# Altium PCB P-FTINT-2-0.PcbDoc
Units mm, origin at the board's own origin, x right, y up, seen from the top; angles counter-clockwise.
Board outline 80.05 x 70.07 mm, 2 copper layers (Component Side, Solder Side), stack 1.571 mm thick; 30 components, 42 nets, 172 pads, 17 vias.
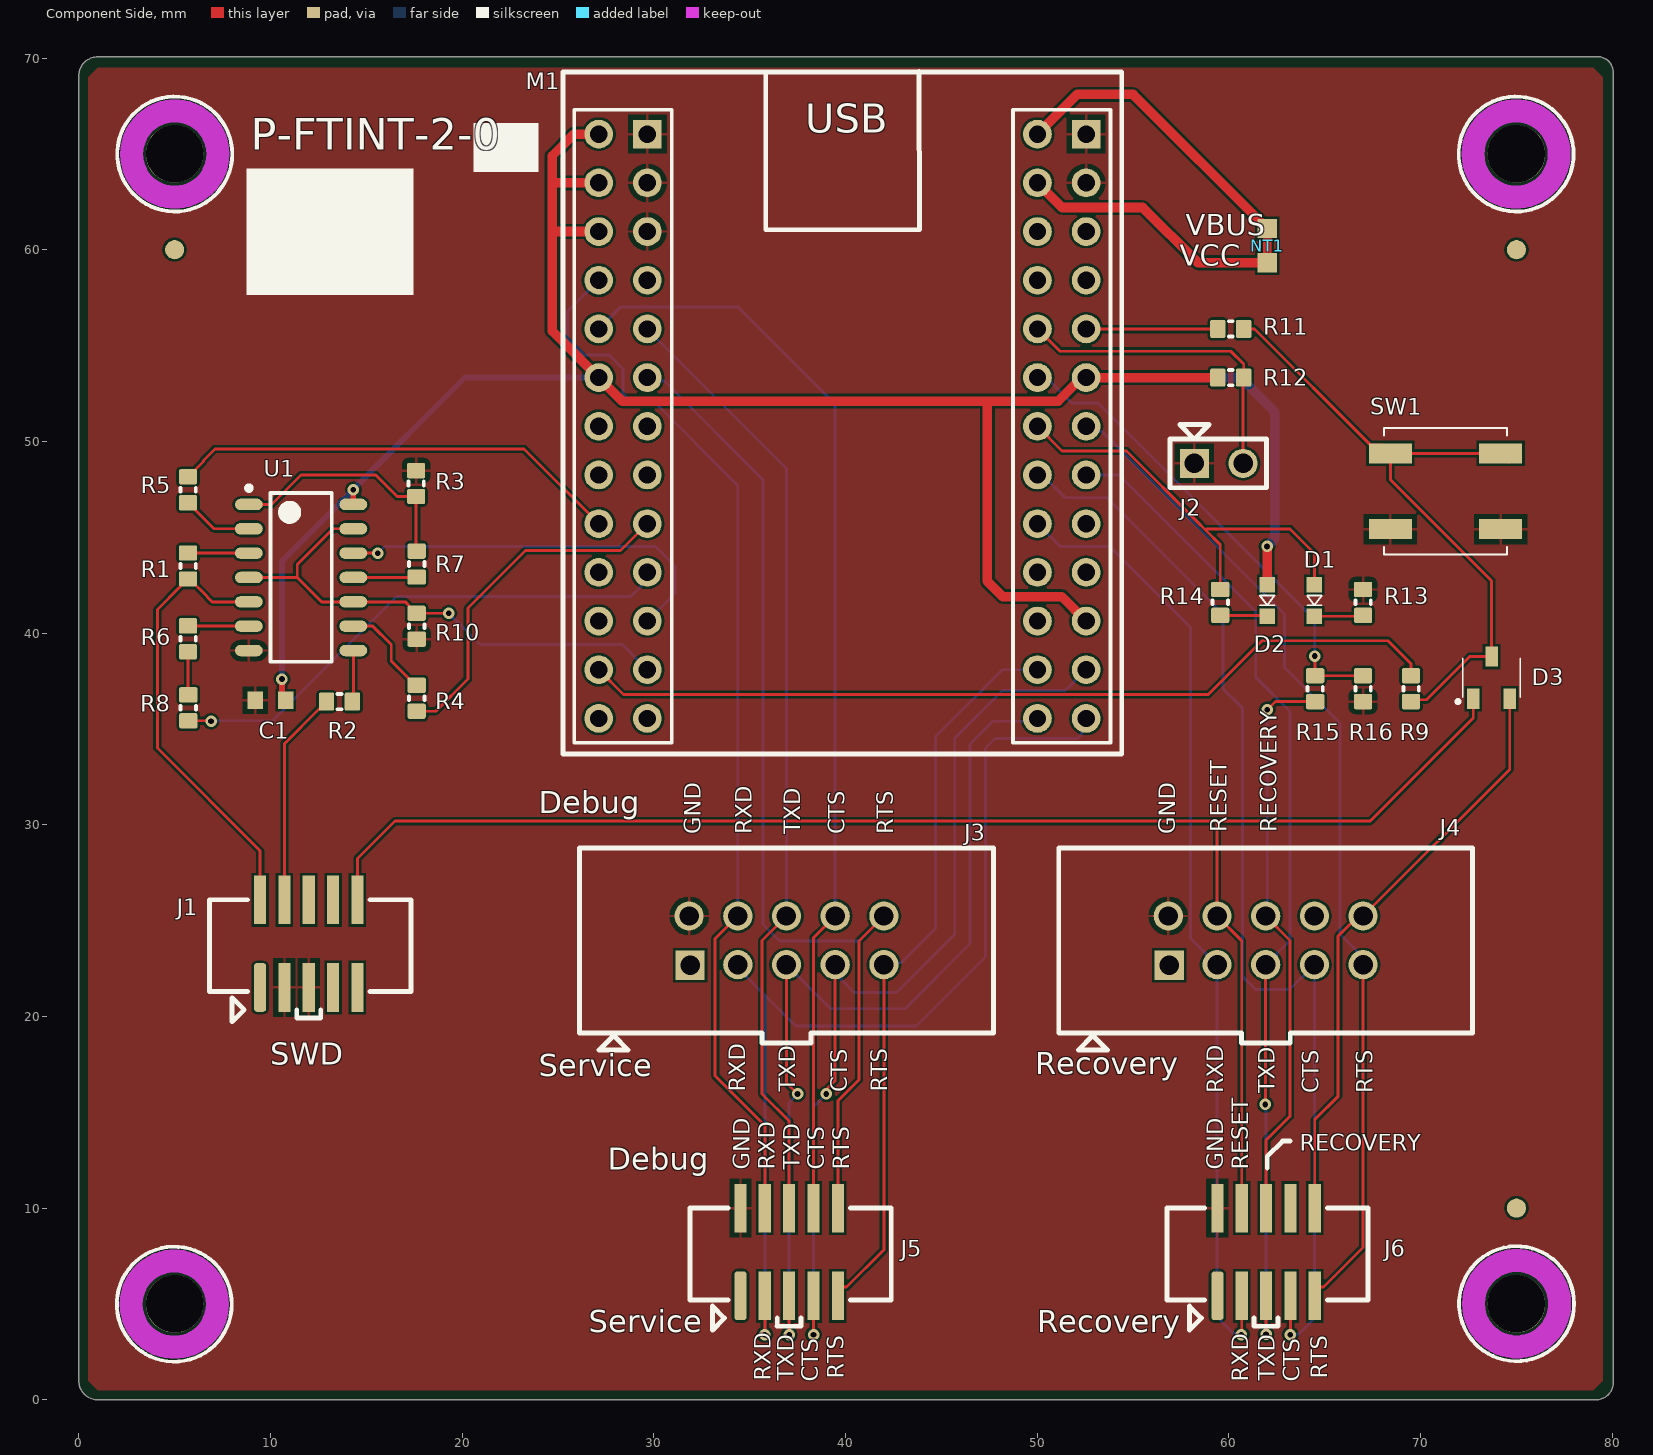
[diagram p0: Component Side view]
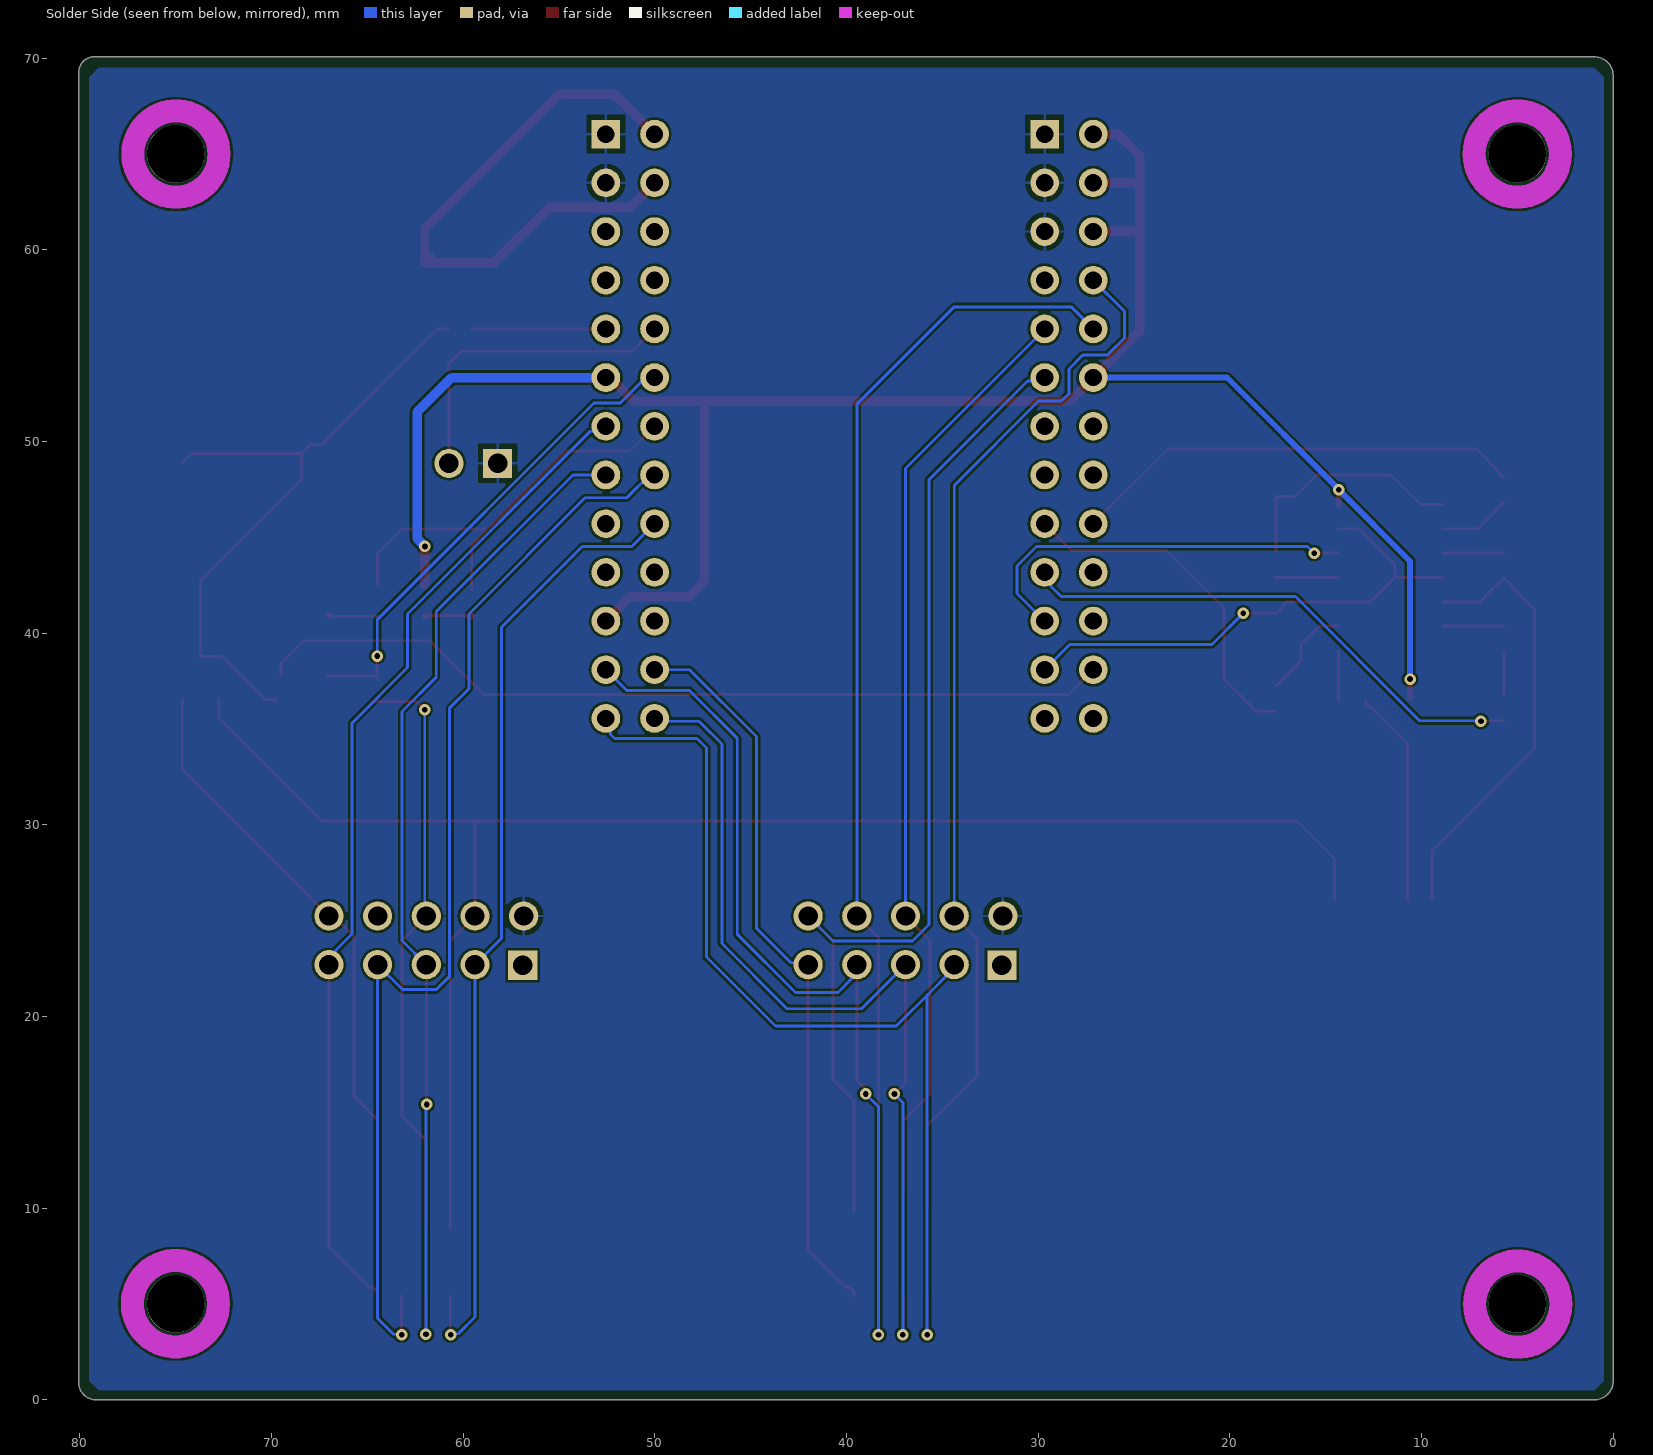
[diagram p1: Solder Side view, seen from below]

## Layer stack, top to bottom
Top Solder: solder mask 0.0102, Solder Resist, Dk 3.5
Component Side: signal copper 0.0356
Dielectric 1: core 1.5, FR-4, Dk 4.3
Solder Side: signal copper 0.0356
Bottom Solder: solder mask 0.0102, Solder Resist, Dk 3.5

## Board outline
1,0 cw(c1,1) 0,1 0,69.065 cw(c1,69.065) 1,70.065 79.25,70.065 cw(c79.25,69.267) 80.048,69.267 80.05,69.267 80.05,0.9 cw(c79.148,0.9) 79.148,-0.002

## Design rules (kind name [scope] priority, off if disabled: settings)
Clearance [All] p1: gap=0.125 ignorepadtopadclearanceinfootprint=TRUE except(0.012: Arc-Text Track-Text SMDPad-Text THPad-Text Via-Text Fill-Text Poly-Text Region-Text Text-Text)
DiffPairsRouting [All] p1: maxlimit=10 minlimit=0.125 mostfreqgap=0.15 toplayer_minwidth=0.381 toplayer_maxwidth=0.381 toplayer_prefwidth=0.381 bottomlayer_minwidth=0.381 bottomlayer_maxwidth=0.381 bottomlayer_prefwidth=0.381 maxuncoupledlength=12.7
FabricationTestPointUsage FabricationTestPointUsage_1 [All] p1: valid=0 allowmultiple=FALSE
FabricationTestpoint FabricationTestpoint_1 [All] p1: side=3 testpointundercomponent=TRUE minsize=1.016 maxsize=2.54 preferedsize=1.524 minholesize=0 maxholesize=1.016 preferedholesize=0.813 testpointgrid=0.025 allowsidetop=TRUE allowsidebottom=TRUE usegrid=TRUE gridtolerance=0
HoleSize [All] p1: absolutevalues=TRUE maxlimit=6 minlimit=0.2 maxpercent=80.000 minpercent=20.000
HoleSize FabricationTestpoint [All] p2 off: absolutevalues=TRUE maxlimit=2.54 minlimit=0.025 maxpercent=80.000 minpercent=20.000
HoleSize FabricationTestPointUsage [All] p3 off: absolutevalues=TRUE maxlimit=2.54 minlimit=0.025 maxpercent=80.000 minpercent=20.000
MinimumSolderMaskSliver [All] p1: minsoldermaskwidth=0.07
MinimumSolderMaskSliver SilkscreenOverComponentPads [All] p2: minsoldermaskwidth=0.254
PlaneClearance [All] p1: clearance=0.5
PlaneConnect [All] p1: planeconnectstyle=Relief reliefexpansion=0.4 reliefentries=4 reliefconductorwidth=0.15 reliefairgap=0.15
PolygonConnect [All] p1: connectstyle=Relief reliefconductorwidth=0.15 reliefentries=4 polygonreliefangle="90 Angle" airgapwidth=0.254
RoutingCorners [All] p1: cornerstyle=45-Degree minsetback=1.25 maxsetback=1.25
RoutingVias [All] p1: holewidth=0.3 width=0.6 viastyle="Through Hole" minholewidth=0.2 minwidth=0.45 maxholewidth=0.45 maxwidth=0.75
SilkToSilkClearance [All] p1: silktosilkclearance=0.154
SilkToSolderMaskClearance [IsPad] p1: minsilkscreentomaskgap=0.05 clearancetoexposedcopper=TRUE
SolderMaskExpansion [All] p1: expansion=0.03 istentingtop=FALSE
Width [All] p1: maxlimit=10 minlimit=0.125 preferedwidth=0.15
20 further rules are at their usual default settings.

## Components (designator, comment, footprint, x,y, rotation, side; value= is the part's Value field where it differs from the comment)
C1 "0.1uF" "CAP 0603 (1608) x 1.2mm" 10,36.5 r0 top
D1 "SML-D12U" "Rohm SML-D12 Red" 64.46,41.7 r90 top
D2 "SML-D12P" "Rohm SML-D12 Green" 62,41.7 r90 top
D3 "BAR43CFILM" ON_SEMI-SOT23-3 73.7,37.675 r0 top
J1 "FTSH-105-01-F-DV-K" SAMTEC-FTSH-105-01-X-DV-K 12,23.8 r90 top
J2 "MOLEX-0022284020" 0022284020 58.149,48.825 r0 top
J3 "T821110A1S100CEU" "10 Way shrouded IDC hdr" 36.92,23.957 r0 top locked
J4 "T821110A1S100CEU" "10 Way shrouded IDC hdr" 61.92,23.957 r0 top
J5 "FTSH-105-01-F-DV-K" SAMTEC-FTSH-105-01-X-DV-K 37.06,7.714 r90 top
J6 "FTSH-105-01-F-DV-K" SAMTEC-FTSH-105-01-X-DV-K 61.94,7.714 r90 top
M1 "FT4232H-56QMINIMDL" FT4232H-56Q 39.837,50.788 r0 top locked
NT1 "NetTie" NetTie 62.001,60.211 r90 top net-tie
R1 "33R" RES0603 5.7,43.5 r90 top
R2 "33R" RES0603 13.6,36.425 r0 top
R3 "4K7" RES0603 17.6,47.8 r90 top
R4 "33R" RES0603 17.628,36.6 r90 top
R5 "33R" RES0603 5.7,47.475 r270 top
R6 "33R" RES0603 5.7,39.7 r90 top
R7 "33R" RES0603 17.628,43.6 r270 top
R8 "33R" RES0603 5.715,36.1 r90 top
R9 "ERJ-PA3J102V" RES0603 69.5,37.1 r270 top
R10 "4K7" RES0603 17.628,40.36 r270 top
R11 "ERJ-PA3J102V" RES0603 60.097,55.868 r0 top
R12 "4K7" RES0603 60.097,53.328 r0 top
R13 "604R" RES0603 67,41.6 r90 top
R14 "604R" RES0603 59.548,41.6 r90 top
R15 "2K2" RES0603 64.5,37.1 r270 top
R16 "2K2" RES0603 67,37.1 r270 top
SW1 "DHT-1158" DHT-1158 71.3,47.4 r0 top
U1 "74LCX126MX" 74LCX126MX 11.6,42.9 r0 top

## Footprints (in the part's own frame and the unit in brackets; to place one, negate y for a bottom-side part, rotate by r counter-clockwise, add the part's x,y. Pads: shape width x height; smd on the part's side, far side on the other; paste and mask are expansions set on the pad)
"10 Way shrouded IDC hdr" [mil]
  rect 60x60 hole 40: 1(-198,-50.5)
  round 60 hole 40: 2(-200,50.5) 3(-100,-49.5) 4(-100,50.5) 5(0,-49.5) 6(0,50.5) 7(100,-49.5) 8(100,50.5) 9(200,-49.5) 10(200,50.5)
  silkscreen extent -425,-225 425,190, body extent -430,-230 430,195, height 50
74LCX126MX [mm] "SOIC, 14-Leads, Body 8.63x3.90mm, Pitch 1.27mm, IPC Medium Density"
  oval 1.45x0.6 smd: 1(-2.725,3.81) 2(-2.725,2.54) 3(-2.725,1.27) 4(-2.725,0) 5(-2.725,-1.27) 6(-2.725,-2.54) 7(-2.725,-3.81) 8(2.725,-3.81) 9(2.725,-2.54) 10(2.725,-1.27) 11(2.725,0) 12(2.725,1.27) 13(2.725,2.54) 14(2.725,3.81)
  silkscreen extent -2.85,-4.4 1.6,4.78, body extent -3.7,-4.67 3.7,4.91, height 1.75
0022284020 [mil] "2-way header"
  rect 60x60 hole 40: 1(2,1)
  round 60 hole 40: 2(102,1)
  silkscreen extent -48,-49 150,81, body extent -53,-54 155,86, height 50
"CAP 0603 (1608) x 1.2mm" [mm] "murata largest recogmended dimentions for 1608 +-0.2mm"
  rect 0.8x0.9 smd: 1(-0.8,0) 2(0.8,0)
  body extent -1.32,-0.62 1.33,0.63, height 1.2
DHT-1158 [mm]
  rect 2.25x1.05 smd: 1(-2.875,1.975) 2(2.875,1.975) 3(-2.875,-1.975) 4(2.875,-1.975)
  silkscreen extent -3.2,-3.3 3.2,3.3, body extent -4.05,-3.35 4.05,3.35, height 1.1
FT4232H-56Q [mm]
  rect 1.5x1.5 hole 0.9: CN2-1(-10.175,15.24) CN3-1(12.715,15.24)
  round 1.5 hole 0.9: CN2-2(-12.715,15.24) CN2-3(-10.175,12.7) CN2-4(-12.715,12.7) CN2-5(-10.175,10.16) CN2-6(-12.715,10.16) CN2-7(-10.175,7.62) CN2-8(-12.715,7.62) CN2-9(-10.175,5.08) CN2-10(-12.715,5.08) CN2-11(-10.175,2.54) CN2-12(-12.715,2.54) CN2-13(-10.175,0) CN2-14(-12.715,0) CN2-15(-10.175,-2.54) CN2-16(-12.715,-2.54) CN2-17(-10.175,-5.08) CN2-18(-12.715,-5.08) CN2-19(-10.175,-7.62) CN2-20(-12.715,-7.62) CN2-21(-10.175,-10.16) CN2-22(-12.715,-10.16) CN2-23(-10.175,-12.7) CN2-24(-12.715,-12.7) CN2-25(-10.175,-15.24) CN2-26(-12.715,-15.24) CN3-2(10.175,15.24) CN3-3(12.715,12.7) CN3-4(10.175,12.7) CN3-5(12.715,10.16) CN3-6(10.175,10.16) CN3-7(12.715,7.62) CN3-8(10.175,7.62) CN3-9(12.715,5.08) CN3-10(10.175,5.08) CN3-11(12.715,2.54) CN3-12(10.175,2.54) CN3-13(12.715,0) CN3-14(10.175,0) CN3-15(12.715,-2.54) CN3-16(10.175,-2.54) CN3-17(12.715,-5.08) CN3-18(10.175,-5.08) CN3-19(12.715,-7.62) CN3-20(10.175,-7.62) CN3-21(12.715,-10.16) CN3-22(10.175,-10.16) CN3-23(12.715,-12.7) CN3-24(10.175,-12.7) CN3-25(12.715,-15.24) CN3-26(10.175,-15.24)
  silkscreen extent -14.58,-17.09 14.57,18.5, body extent -14.7,-17.22 14.7,18.63, height 1.27
NetTie [mm]
  rect 1x1 smd paste-1: 1(-0.889,0) 2(0.889,0)
  Component Side lines w0.42: -0.889,0 0.889,0
  body extent -1.42,-0.53 1.42,0.53, height 1.27
ON_SEMI-SOT23-3 [mm]
  rect 0.65x1.06 smd: 1(-0.95,-1.1) 2(0.95,-1.1) 3(0,1.1)
  silkscreen extent -1.81,-1.31 1.5,1, body extent -1.93,-1.77 1.57,1.77, height 1.1
RES0603 [mm] "Chip Resistor EIA0603, 2-Leads, Body 1.60x0.80mm, IPC Medium Density"
  rrect25% 0.8x0.95 smd: 1(-0.675,0)
  rrect20% 0.8x0.95 smd: 2(0.675,0)
  silkscreen extent -0.1,-0.4 0.1,0.4, body extent -1.38,-0.77 1.38,0.77, height 0.45
"Rohm SML-D12 Green" [mm]
  rect 0.8x0.8 smd paste-0.05: 1(-0.825,0) 2(0.825,0)
  silkscreen extent -0.25,-0.37 0.25,0.38, body extent -1.43,-0.6 1.42,0.6, height 0.55
"Rohm SML-D12 Red" [mm]
  rect 0.8x0.8 smd paste-0.05: 1(-0.825,0) 2(0.825,0)
  silkscreen extent -0.25,-0.38 0.25,0.37, body extent -1.43,-0.6 1.42,0.6, height 0.55
SAMTEC-FTSH-105-01-X-DV-K [mil] ".050\" Micro Terminal Strip, 10 pos"
  rrect50% 100x25 smd: 1(-90,100)
  rect 100x25 smd: 2(90,100) 3(-90,50) 4(90,50) 5(-90,0) 6(90,0) 7(-90,-50) 8(90,-50) 9(-90,-100) 10(90,-100)
  silkscreen extent -160,-210 90,204, body extent -165,-227 158,218, height 240

## Part data
C1: library part CGA3E2X7R1E104K080AA, "CAP CER 0.1UF 25V X7R 0603", Capacitance=100nF, Case/Package=0603, Case Code (Metric)=1608, Dielectric=X7R, Manufacturer=TDK, Max Operating Temperature=125°C, Min Operating Temperature=-55°C, Package Quantity=1, Ratings=AEC-Q200, Supplier Part Number 1=445-5667-1-ND, Tolerance=10%, Voltage Rating=25V, Case Code (Imperial)=0603, ComponentLink1Description=http://www.farnell.com/datasheets/1735392.pdf?src-supplier=Element14, ComponentLink1URL=http://www.farnell.com/datasheets/1735392.pdf?src-supplier=Element14, ComponentLink2Description=https://product.tdk.com/info/en/documents/chara_sheet/CGA3E2X7R1E104K080AA.pdf?src-supplier=Mouser, ComponentLink2URL=https://product.tdk.com/info/en/documents/chara_sheet/CGA3E2X7R1E104K080AA.pdf?src-supplier=Mouser, ComponentLink3Description=http://product.tdk.com/capacitor/mlcc/en/documents/mlccspec_automotive_general_midvoltage_en.pdf?src-supplier=Future+Electronics, ComponentLink3URL=http://product.tdk.com/capacitor/mlcc/en/documents/mlccspec_automotive_general_midvoltage_en.pdf?src-supplier=Future+Electronics, ComponentLink4Description=http://www.farnell.com/datasheets/1913358.pdf?src-supplier=Newark, ComponentLink4URL=http://www.farnell.com/datasheets/1913358.pdf?src-supplier=Newark, Composition=Ceramic, Depth=0.8mm, Height=0.8mm, Lead Free="Lead Free", Length=1.6mm, Manufacturer Part Number=CGA3E2X7R1E104K080AA, Mount="Surface Mount", Packaging="Tape and Reel", Pricing 1="1=0.1, 10=0.057, 100=0.0253, 500=0.0181, 1000=0.01422 (USD)", REACH SVHC="No SVHC", Stock 1=1795818, Supplier 1=Digi-Key, Termination=SMD/SMT, Thickness=0.035inch, Voltage Rating (DC)=25V, Weight=7.1E-05oz, Width=0.031inch
D1: "1.6 x 0.8 x 0.55mm (0603) LED 620nm Red", Colour=Red, Current - Test=20mA, Luminous Flux @ Current - Test=-, Manufacturer="Rohm Semiconductor", Manufacturer Part Number=SML-D12U8WT86, Millicandela Rating=63mcd, Package / Case="0603 (1608 Metric)", Supplier Part Number 1=511-1580-1-ND, Voltage - Forward (Vf) (Typ)=2.2V, Category=Optoelectronics, ComponentLink1Description=http://rohmfs.rohm.com/en/products/databook/datasheet/opto/led/chip_mono/sml-d1.pdf, ComponentLink1URL=http://rohmfs.rohm.com/en/products/databook/datasheet/opto/led/chip_mono/sml-d1.pdf, Height=0.55mm, Lens Style/Size="Rectangle with Flat Top, 1.2mm x 0.8mm", Lens Type="Diffused, White", Mounting Type="Surface Mount", Packaging="Cut Tape (CT)", Pricing 1="1=0.38, 10=0.279, 25=0.2232, 100=0.1478, 250=0.1046, 500=0.08926, 1000=0.06974 (GBP)", RoHS="RoHS Compliant", Size / Dimension="1.60mm L x 0.80mm W", Stock 1=5722, Supplier 1=Digi-Key, Supplier 2=Farnell, Supplier Part Number 2=1685094, Viewing Angle=-, Wavelength - Dominant=620nm, Wavelength - Peak=-
D2: "1.6 x 0.8 x 0.55mm (0603) LED 560nm Green", Colour=Green, Current - Test=20mA, Luminous Flux @ Current - Test=-, Manufacturer="Rohm Semiconductor", Manufacturer Part Number=SML-D12P8WT86, Millicandela Rating=6.3mcd, Package / Case="0603 (1608 Metric)", Supplier Part Number 1=511-1579-1-ND, Voltage - Forward (Vf) (Typ)=2.2V, Category=Optoelectronics, ComponentLink1Description=http://rohmfs.rohm.com/en/products/databook/datasheet/opto/led/chip_mono/sml-d1.pdf, ComponentLink1URL=http://rohmfs.rohm.com/en/products/databook/datasheet/opto/led/chip_mono/sml-d1.pdf, Height=0.55mm, Lens Style/Size="Rectangle with Flat Top, 1.2mm x 0.8mm", Lens Type="Diffused, White", Mounting Type="Surface Mount", Packaging="Cut Tape (CT)", Pricing 1="1=0.38, 10=0.279, 25=0.2232, 100=0.1478, 250=0.1046, 500=0.08926, 1000=0.06974 (GBP)", RoHS="RoHS Compliant", Size / Dimension="1.60mm L x 0.80mm W", Stock 1=19305, Supplier 1=Digi-Key, Viewing Angle=-, Wavelength - Dominant=560nm, Wavelength - Peak=-
D3: "Small Signal Schottky Diode, Dual Common Cathode, 30 V, 100 mA, 330 mV, 750 mA, 150 °C", Average Rectified Current=100mA, Capacitance=7pF, Case/Package=SOT-23, Forward Voltage=1V, Manufacturer=STMicroelectronics, Max Forward Surge Current (Ifsm)=750mA, Max Operating Temperature=150°C, Max Repetitive Reverse Voltage (Vrrm)=30V, Max Reverse Current=500nA, Min Operating Temperature=-65°C, Package Quantity=3000, Power Dissipation=250mW, Supplier Part Number 1=9801383, Category="Rectifier Diodes", ComponentLink1Description=https://datasheet.ciiva.com/27050/869700-27050546.pdf?src-supplier=Jameco, ComponentLink1URL=https://datasheet.ciiva.com/27050/869700-27050546.pdf?src-supplier=Jameco, ComponentLink2Description=https://datasheet.ciiva.com/1199/1700360-1199952.pdf?src-supplier=Farnell, ComponentLink2URL=https://datasheet.ciiva.com/1199/1700360-1199952.pdf?src-supplier=Farnell, ComponentLink3Description=https://datasheet.ciiva.com/1199/1700360-1199953.pdf?src-supplier=Farnell, ComponentLink3URL=https://datasheet.ciiva.com/1199/1700360-1199953.pdf?src-supplier=Farnell, ComponentLink4Description=https://datasheet.ciiva.com/14558/70013844-14558997.pdf?src-supplier=Allied+Electronics, ComponentLink4URL=https://datasheet.ciiva.com/14558/70013844-14558997.pdf?src-supplier=Allied+Electronics, ComponentLink5Description=https://datasheet.ciiva.com/1177/1837092-1177592.pdf?src-supplier=Element14, ComponentLink5URL=https://datasheet.ciiva.com/1177/1837092-1177592.pdf?src-supplier=Element14, ComponentLink6Description=https://datasheet.ciiva.com/1177/1837092-1177593.pdf?src-supplier=Element14, ComponentLink6URL=https://datasheet.ciiva.com/1177/1837092-1177593.pdf?src-supplier=Element14, ComponentLink7Description=https://datasheet.ciiva.com/905/cd00000764-905866.pdf?src-supplier=Digi-Key, ComponentLink7URL=https://datasheet.ciiva.com/905/cd00000764-905866.pdf?src-supplier=Digi-Key, ComponentLink8Description=https://datasheet.ciiva.com/1177/1700360-1177594.pdf?src-supplier=Element14, ComponentLink8URL=https://datasheet.ciiva.com/1177/1700360-1177594.pdf?src-supplier=Element14, ComponentLink9Description=https://datasheet.ciiva.com/16205/cd00000764-16205466.pdf?src-supplier=Future+Electronics, ComponentLink9URL=https://datasheet.ciiva.com/16205/cd00000764-16205466.pdf?src-supplier=Future+Electronics, ComponentLink10Description=https://datasheet.ciiva.com/905/cd00000764-905867.pdf?src-supplier=Digi-Key, ComponentLink10URL=https://datasheet.ciiva.com/905/cd00000764-905867.pdf?src-supplier=Digi-Key, ComponentLink11Description=https://datasheet.ciiva.com/905/cd00000764-905868.pdf?src-supplier=Digi-Key, ComponentLink11URL=https://datasheet.ciiva.com/905/cd00000764-905868.pdf?src-supplier=Digi-Key, Contact Plating=Tin,Matte, Current Rating=100mA, Element Configuration="Common Cathode", Forward Current=100mA, Height=0.95mm, Lead Free="Lead Free", Length=2.9mm, Manufacturer Part Number=BAR43CFILM, Max Reverse Voltage (DC)=30V, Mount="Surface Mount", Number of Pins=3, Packaging="Tape and Reel", Peak Non-Repetitive Surge Current=750mA, Pricing 1="5=0.46900, 10=0.31900, 100=0.14900, 500=0.08670, 1000=0.05920 (GBP)", Radiation Hardening=No, REACH SVHC="No SVHC", Reverse Recovery Time=5ns, RoHS=Yes, RoHS Compliant=Yes, Series=BAR43, Stock 1=113090, Supplier 1=Farnell, Termination=SMD/SMT, Voltage Rating (DC)=30V, Weight=0.01lb, Width=3.05mm
J1 J5 J6: "CONN HEADER 10POS DUAL .05\" SMD", Color=Black, Manufacturer="Samtec Inc.", Supplier Part Number 1=SAM8796-ND, Category="Connectors, Interconnects", ComponentLink1Description=http://suddendocs.samtec.com/prints/ftsh-1xx-xx-xxx-dv-xxx-mkt.pdf, ComponentLink1URL=http://suddendocs.samtec.com/prints/ftsh-1xx-xx-xxx-dv-xxx-mkt.pdf, Connector Type="Header, Unshrouded", Contact Finish=Gold, Contact Finish Thickness="3µin (0.08µm)", Contact Mating Length="0.120\" (3.05mm)", Contact Type="Male Pin", Fastening Type=-, Features="Keying Shroud", Manufacturer Part Number=FTSH-105-01-F-DV-K, Mounting Type="Surface Mount", Number of Positions=10, Number of Positions Loaded=All, Number of Rows=2, Packaging=Tube, Pitch="0.050\" (1.27mm)", Pricing 1="1=2.26, 10=1.907, 50=1.647, 100=1.4737, 250=1.30032, 500=1.21362, 1000=1.12693, 2500=1.08358, 5000=1.06191 (GBP)", RoHS="RoHS Compliant", Row Spacing="0.050\" (1.27mm)", Stock 1=13304, Supplier 1=Digi-Key, Termination=Solder
J2: "CONN HEADER 2POS .100 VERT TIN", Color=Black, Manufacturer="Molex, LLC", Manufacturer Part Number=0022284020, Supplier Part Number 1=WM50014-02-ND, Category="Connectors, Interconnects", ComponentLink1Description=http://www.molex.com/pdm_docs/sd/022284020_sd.pdf, ComponentLink1URL=http://www.molex.com/pdm_docs/sd/022284020_sd.pdf, Connector Type="Header, Unshrouded, Breakaway", Contact Finish=Tin, Contact Finish Thickness="100µin (2.54µm)", Contact Mating Length="0.240\" (6.10mm)", Contact Type="Male Pin", Fastening Type=-, Features=-, Mounting Type="Through Hole", Number of Positions=2, Number of Positions Loaded=All, Number of Rows=1, Packaging=Bulk, Pitch="0.100\" (2.54mm)", Pricing 1="1=0.12, 10=0.108, 25=0.0808, 50=0.0692, 100=0.0668, 250=0.0576, 500=0.0553 (GBP)", RoHS="RoHS Compliant", Row Spacing=-, Stock 1=10077, Supplier 1=Digi-Key, Termination=Solder
J3 J4: "Conn Shrouded Header HDR 10 POS 2.54mm Solder ST Thru-Hole", Contact Resistance=20mR, Current Rating=3A, Manufacturer=Amphenol, Max Operating Temperature=105°C, Min Operating Temperature=-40°C, Supplier Part Number 1=2215304, Category=Connectors, ComponentLink1Description=https://datasheet.ciiva.com/8045/1846058-8045255.pdf?src-supplier=Element14, ComponentLink1URL=https://datasheet.ciiva.com/8045/1846058-8045255.pdf?src-supplier=Element14, Contact Material=Bronze,Brass, Contact Plating=Gold, Depth=8.95mm, Gender=Male, Housing Material=Polybutylene, Length=20.32mm, Manufacturer Part Number=T821110A1S100CEU, Max Current Rating=3A, Number of Contacts=10, Number of Rows=2, Orientation=Straight, Packaging="Cut Tape", Pitch=2.54mm, REACH SVHC="No SVHC", RoHS=Yes, RoHS Compliant=Yes, Series=T821, Supplier 1=Farnell, Termination=Solder
M1: "IC MINI MODULE USB/FIFO 56QFN", Case/Package=Module, Manufacturer=FTDI, Max Operating Temperature=85°C, Min Operating Temperature=-40°C, Supplier Part Number 1=2535452, Features=I²C, Manufacturer Part Number=FT4232H-56QMINIMDL, Packaging=Bulk, Pricing 1="1=20.62 (GBP)", REACH SVHC="No SVHC", Stock 1=0, Supplier 1=Farnell
R1 R2 R4 R5 R6 R7 R8: library part ERJ-3GEYJ330V, "RES SMD 33 OHM 5% 1/10W 0603", Case/Package=0603, Case Code (Metric)=1608, Manufacturer=Panasonic, Max Operating Temperature=155°C, Max Power Dissipation=100mW, Min Operating Temperature=-55°C, Package Quantity=1, Supplier Part Number 1=P33GCT-ND, Temperature Coefficient=200ppm/°C, Tolerance=5%, Voltage Rating=75V, Voltage Rating (DC)=50V, Case Code (Imperial)=0603, ComponentLink1Description=http://www.mouser.com/ds/2/315/AOA0000CE1-37422.pdf?src-supplier=Mouser, ComponentLink1URL=http://www.mouser.com/ds/2/315/AOA0000CE1-37422.pdf?src-supplier=Mouser, ComponentLink2Description=https://www.verical.com/server-webapp/html/getDatasheet?partID=52004&src-supplier=Verical, ComponentLink2URL=https://www.verical.com/server-webapp/html/getDatasheet?partID=52004&src-supplier=Verical, ComponentLink3Description=http://www.farnell.com/datasheets/2059623.pdf?src-supplier=Farnell, ComponentLink3URL=http://www.farnell.com/datasheets/2059623.pdf?src-supplier=Farnell, ComponentLink4Description=http://industrial.panasonic.com/www-data/pdf/AOA0000/AOA0000CE1.pdf?src-supplier=Avnet, ComponentLink4URL=http://industrial.panasonic.com/www-data/pdf/AOA0000/AOA0000CE1.pdf?src-supplier=Avnet, ComponentLink5Description=http://www.farnell.com/datasheets/1500035.pdf?src-supplier=Element14, ComponentLink5URL=http://www.farnell.com/datasheets/1500035.pdf?src-supplier=Element14, Composition="Thick Film", Contact Plating=Tin, Depth=0.8mm, Features="Automotive AEC-Q200", Height=0.45mm, Lead Free="Lead Free", Length=1.6mm, Manufacturer Part Number=ERJ-3GEYJ330V, Military Standard=Not, Mount="Surface Mount", Number of Terminations=2, Packaging="Tape and Reel", Power Rating=100mW, Pricing 1="1=0.1, 10=0.043, 100=0.0176, 1000=0.00791, 2500=0.00686 (USD)", Radiation Hardening=No, REACH SVHC="No SVHC", Resistance=33R, Stock 1=1457212, Supplier 1=Digi-Key, Termination=SMD/SMT, Width=0.8mm
R3 R10 R12: library part ERJ-3GEYJ472V, "RES SMD 4.7K OHM 5% 1/10W 0603", Case/Package=0603, Case Code (Metric)=1608, Manufacturer=Panasonic, Max Operating Temperature=155°C, Max Power Dissipation=100mW, Min Operating Temperature=-55°C, Package Quantity=1, Resistance=4.7kR, Supplier Part Number 1=P4.7KGCT-ND, Temperature Coefficient=200ppm/°C, Tolerance=5%, Voltage Rating=75V, Voltage Rating (DC)=50V, Case Code (Imperial)=0603, ComponentLink1Description=http://www.farnell.com/datasheets/2059623.pdf?src-supplier=Element14, ComponentLink1URL=http://www.farnell.com/datasheets/2059623.pdf?src-supplier=Element14, ComponentLink2Description=http://www.mouser.com/ds/2/315/AOA0000C84-947596.pdf?src-supplier=Mouser, ComponentLink2URL=http://www.mouser.com/ds/2/315/AOA0000C84-947596.pdf?src-supplier=Mouser, ComponentLink3Description=http://www.farnell.com/datasheets/2059623.pdf?src-supplier=Farnell, ComponentLink3URL=http://www.farnell.com/datasheets/2059623.pdf?src-supplier=Farnell, ComponentLink4Description=http://industrial.panasonic.com/www-data/pdf/AOA0000/AOA0000CE1.pdf?src-supplier=Avnet+Asia, ComponentLink4URL=http://industrial.panasonic.com/www-data/pdf/AOA0000/AOA0000CE1.pdf?src-supplier=Avnet+Asia, ComponentLink5Description=http://www.farnell.com/datasheets/1678796.pdf?src-supplier=Element14, ComponentLink5URL=http://www.farnell.com/datasheets/1678796.pdf?src-supplier=Element14, ComponentLink6Description=https://www.alliedelec.com/m/d/51cd0790071e1666bdb9d00c57fcf960.pdf?src-supplier=Allied+Electronics, ComponentLink6URL=https://www.alliedelec.com/m/d/51cd0790071e1666bdb9d00c57fcf960.pdf?src-supplier=Allied+Electronics, ComponentLink7Description=http://industrial.panasonic.com/www-data/pdf/AOA0000/AOA0000CE1.pdf?src-supplier=Avnet, ComponentLink7URL=http://industrial.panasonic.com/www-data/pdf/AOA0000/AOA0000CE1.pdf?src-supplier=Avnet, ComponentLink8Description=http://www.jameco.com/Jameco/Products/ProdDS/921942.pdf?src-supplier=Jameco, ComponentLink8URL=http://www.jameco.com/Jameco/Products/ProdDS/921942.pdf?src-supplier=Jameco, Composition="Thick Film", Contact Plating=Tin, Depth=0.8mm, Features="Automotive AEC-Q200", Height=0.45mm, Lead Free="Lead Free", Length=1.6mm, Manufacturer Part Number=ERJ-3GEYJ472V, Military Standard=Not, Mount="Surface Mount", Number of Terminations=2, Packaging="Tape and Reel", Power Rating=100mW, Pricing 1="1=0.1, 10=0.043, 100=0.0176, 1000=0.00791, 2500=0.00686 (USD)", Radiation Hardening=No, REACH SVHC="No SVHC", Stock 1=7744297, Supplier 1=Digi-Key, Termination=SMD/SMT, Width=0.031inch, Working Voltage=75V
R9 R11: "RES SMD 1K OHM 5% 1/10W 0603", Case Code (Imperial)=0603, Case Code (Metric)=1608, Manufacturer=Panasonic, Max Operating Temperature=155°C, Max Power Dissipation=250mW, Min Operating Temperature=-55°C, Resistance=1k, Resistor Type="Thick Film", Temperature Coefficient=200ppm/°C, Tolerance=5%, Case/Package=0603, Category="Chip SMD Resistors", ComponentLink1Description=https://industrial.panasonic.com/ww/system/files/data/download/catalog/id_fixed-resistors_e_1.pdf?src-supplier=Digi-Key, ComponentLink1URL=https://industrial.panasonic.com/ww/system/files/data/download/catalog/id_fixed-resistors_e_1.pdf?src-supplier=Digi-Key, Features="Automotive AEC-Q200", Height=0.018inch, Length=0.063inch, Manufacturer Part Number=ERJ-PA3J102V, Number of Terminations=2, Packaging="Tape and Reel", Pricing 1="1=0.11000, 10=0.09800, 100=0.03750, 1000=0.01650, 2500=0.01425 (USD)", RoHS=Yes, Stock 1=12367, Supplier 1=Digi-Key, Width=0.031inch
R13 R14: library part ERJ-3EKF6040V, "RES SMD 604 OHM 1% 1/10W 0603", Case/Package=0603, Case Code (Metric)=1608, Manufacturer=Panasonic, Max Operating Temperature=155°C, Max Power Dissipation=100mW, Min Operating Temperature=-55°C, Package Quantity=1, Supplier Part Number 1=P604HCT-ND, Temperature Coefficient=100ppm/°C, Tolerance=1%, Voltage Rating=75V, Voltage Rating (DC)=50V, Case Code (Imperial)=0603, ComponentLink1Description=http://www.jameco.com/Jameco/Products/ProdDS/1988284.pdf?src-supplier=Jameco, ComponentLink1URL=http://www.jameco.com/Jameco/Products/ProdDS/1988284.pdf?src-supplier=Jameco, ComponentLink2Description=http://www.farnell.com/datasheets/1678782.pdf?src-supplier=Element14, ComponentLink2URL=http://www.farnell.com/datasheets/1678782.pdf?src-supplier=Element14, ComponentLink3Description=https://www.alliedelec.com/m/d/623f45ff1957d936ff56d46fd1c28cac.pdf?src-supplier=Allied+Electronics, ComponentLink3URL=https://www.alliedelec.com/m/d/623f45ff1957d936ff56d46fd1c28cac.pdf?src-supplier=Allied+Electronics, ComponentLink4Description=http://www.onlinecomponents.com/productFiles/mf-PSC/aoa0000ce2.pdf?src-supplier=Onlinecomponents.com, ComponentLink4URL=http://www.onlinecomponents.com/productFiles/mf-PSC/aoa0000ce2.pdf?src-supplier=Onlinecomponents.com, ComponentLink5Description=http://www.mouser.com/ds/2/315/AOA0000C304-1149620.pdf?src-supplier=Mouser, ComponentLink5URL=http://www.mouser.com/ds/2/315/AOA0000C304-1149620.pdf?src-supplier=Mouser, ComponentLink6Description=http://www.farnell.com/datasheets/1911175.pdf?src-supplier=Farnell, ComponentLink6URL=http://www.farnell.com/datasheets/1911175.pdf?src-supplier=Farnell, ComponentLink7Description=http://www.farnell.com/datasheets/426256.pdf?src-supplier=Element14, ComponentLink7URL=http://www.farnell.com/datasheets/426256.pdf?src-supplier=Element14, Composition="Thick Film", Contact Plating=Tin, Depth=0.8mm, Features="Automotive AEC-Q200", Height=0.45mm, Lead Free="Lead Free", Length=1.6mm, Manufacturer Part Number=ERJ-3EKF6040V, Military Standard=Not, Mount="Surface Mount", Number of Terminations=2, Packaging="Tape and Reel", Power Rating=100mW, Pricing 1="1=0.1, 10=0.065, 100=0.0264, 1000=0.01186, 2500=0.01029 (USD)", Radiation Hardening=No, REACH SVHC="No SVHC", Resistance=604R, Stock 1=478130, Supplier 1=Digi-Key, Termination=SMD/SMT, Weight=7.1E-05oz, Width=0.031inch
R15 R16: library part ERJ-3GEYJ222V, "RES SMD 2.2K OHM 5% 1/10W 0603", Case/Package=0603, Case Code (Metric)=1608, Manufacturer=Panasonic, Max Operating Temperature=155°C, Max Power Dissipation=100mW, Min Operating Temperature=-55°C, Package Quantity=1, Resistance=2.2kR, Supplier Part Number 1=P2.2KGCT-ND, Temperature Coefficient=200ppm/°C, Tolerance=5%, Voltage Rating=75V, Voltage Rating (DC)=50V, Case Code (Imperial)=0603, ComponentLink1Description=https://www.alliedelec.com/m/d/51cd0790071e1666bdb9d00c57fcf960.pdf?src-supplier=Allied+Electronics, ComponentLink1URL=https://www.alliedelec.com/m/d/51cd0790071e1666bdb9d00c57fcf960.pdf?src-supplier=Allied+Electronics, ComponentLink2Description=http://industrial.panasonic.com/www-data/pdf/AOA0000/AOA0000CE1.pdf?src-supplier=Avnet, ComponentLink2URL=http://industrial.panasonic.com/www-data/pdf/AOA0000/AOA0000CE1.pdf?src-supplier=Avnet, ComponentLink3Description=http://www.farnell.com/datasheets/2059623.pdf?src-supplier=Element14, ComponentLink3URL=http://www.farnell.com/datasheets/2059623.pdf?src-supplier=Element14, ComponentLink4Description=https://industrial.panasonic.com/cdbs/www-data/pdf/RDA0000/AOA0000C301.pdf?src-supplier=Future+Electronics, ComponentLink4URL=https://industrial.panasonic.com/cdbs/www-data/pdf/RDA0000/AOA0000C301.pdf?src-supplier=Future+Electronics, ComponentLink5Description=http://www.jameco.com/Jameco/Products/ProdDS/1988639.pdf?src-supplier=Jameco, ComponentLink5URL=http://www.jameco.com/Jameco/Products/ProdDS/1988639.pdf?src-supplier=Jameco, ComponentLink6Description=http://industrial.panasonic.com/www-data/pdf/AOA0000/AOA0000CE1.pdf?src-supplier=Avnet+Europe, ComponentLink6URL=http://industrial.panasonic.com/www-data/pdf/AOA0000/AOA0000CE1.pdf?src-supplier=Avnet+Europe, ComponentLink7Description=http://www.farnell.com/datasheets/2059623.pdf?src-supplier=Farnell, ComponentLink7URL=http://www.farnell.com/datasheets/2059623.pdf?src-supplier=Farnell, ComponentLink8Description=http://www.farnell.com/datasheets/1678796.pdf?src-supplier=Element14, ComponentLink8URL=http://www.farnell.com/datasheets/1678796.pdf?src-supplier=Element14, Composition="Thick Film", Contact Plating=Tin, Depth=0.8mm, Features="Automotive AEC-Q200", Height=0.45mm, Lead Free="Lead Free", Length=1.6mm, Manufacturer Part Number=ERJ-3GEYJ222V, Military Standard=Not, Mount="Surface Mount", Number of Terminations=2, Packaging="Tape and Reel", Power Rating=100mW, Pricing 1="1=0.1, 10=0.043, 100=0.0176, 1000=0.00791, 2500=0.00686 (USD)", Radiation Hardening=No, REACH SVHC="No SVHC", Stock 1=4299124, Supplier 1=Digi-Key, Termination=SMD/SMT, Width=0.8mm, Working Voltage=75V
U1: "Buffers & Line Drivers LV Quad Buffer 5V Tolerant I/O", Case/Package=SOIC, High Level Output Current=-24mA, Low Level Output Current=24mA, Manufacturer="ON Semiconductor / Fairchild", Max Operating Temperature=85°C, Max Supply Voltage=3.6V, Min Operating Temperature=-40°C, Min Supply Voltage=2V, Package Quantity=2500, Quiescent Current=10uA, Supplier Part Number 1=74LCX126MX-ND, ComponentLink1Description=http://www.mouser.com/ds/2/149/74LCX126-106501.pdf?src-supplier=Mouser, ComponentLink1URL=http://www.mouser.com/ds/2/149/74LCX126-106501.pdf?src-supplier=Mouser, ComponentLink2Description=http://www.fairchildsemi.com/datasheets/74/74LCX126.pdf?src-supplier=Digi-Key, ComponentLink2URL=http://www.fairchildsemi.com/datasheets/74/74LCX126.pdf?src-supplier=Digi-Key, ComponentLink3Description=https://www.fairchildsemi.com/datasheets/74/74LCX126.pdf?src-supplier=Avnet, ComponentLink3URL=https://www.fairchildsemi.com/datasheets/74/74LCX126.pdf?src-supplier=Avnet, ComponentLink4Description=http://www.produktinfo.conrad.com/datenblaetter/1200000-1299999/001251913-da-01-en-IC_BUFFER_QUAD_LV_74LCX126MX_SOIC_14_FSC.pdf?src-supplier=Conrad, ComponentLink4URL=http://www.produktinfo.conrad.com/datenblaetter/1200000-1299999/001251913-da-01-en-IC_BUFFER_QUAD_LV_74LCX126MX_SOIC_14_FSC.pdf?src-supplier=Conrad, Contact Plating=Tin,Matte, Height=1.5mm, Lead Free="Lead Free", Length=8.75mm, Logic Function=Buffer,Inverting, Manufacturer Part Number=74LCX126MX, Mount="Surface Mount", Number of Bits=4, Number of Bits per Element=1, Number of Channels=4, Number of elements=4, Number of Input Lines=4, Number of Inputs=4, Number of Output Lines=3, Number of Outputs=4, Number of Pins=14, Packaging="Tape and Reel", Polarity=Non-Inverting, Propagation Delay=5.5ns, Radiation Hardening=No, Schmitt Trigger Input=No, Stock 1=0, Supplier 1=Digi-Key, Turn-On Delay Time=7.8ns, Weight=0.15g, Width=4mm

## Free pads (board coordinates)
  round 3 hole 3 unplated mask+0.102: 0(5,5) 0(5,65) 0(75,5) 0(75,65)
  round 1 smd paste-1 mask+0.5: 1(5,60) 1(75,10) 1(75,60)

## Via types
v1: diameter 0.6, hole 0.3, Component Side to Solder Side, tented both sides, 17 vias

## Nets (pads, with @x,y where several pads share a name; then routed paths per layer and width w, separated by ;. In a path a pad name is that pad's centre, name@x,y a point inside that pad or via, vN(x,y) a via of type N, cw(c..) or ccw(c..) an arc to the next point about the centre after c; other vN are vias at no path point)
3V3: C1.2 D2.2 M1.CN2-2 M1.CN2-4 M1.CN2-6 M1.CN2-12 M1.CN3-11 M1.CN3-21 R12.1 U1.14 | length 117.6
  Component Side w0.3: C1.2@10.6,36.6 v1(10.6,37.6) ; U1.14 v1(14.325,47.475) ; 24.7,63.606 24.818,63.488 ; M1.CN3-21 M1.CN3-21@52.8,40.628 ; D2.2@61.992,42.533 D2.2 ; v1(61.992,44.52) v1@62.073,44.52
  Component Side w0.5: 24.818,63.488 M1.CN2-4 ; M1.CN2-6 24.7,60.948 ; M1.CN2-2 25.828,66.028 24.7,64.9 24.7,63.606 24.7,60.948 ; M1.CN3-21 51.28,41.9 48.2,41.9 47.4,42.7 47.4,52.1 ; R12.1 52.324,53.328 51.096,52.1 47.4,52.1 ; D2.2@61.992,42.533 v1(61.992,44.52) ; 24.7,60.948 24.7,55.75 M1.CN2-12 28.35,52.1 47.4,52.1
  Solder Side w0.3: v1(10.6,37.6) 10.6,43.75 v1(14.325,47.475) 14.325,47.5 20.153,53.328 M1.CN2-12
  Solder Side w0.5: M1.CN3-11 60.596,53.328 62.4,51.524 62.4,44.928 v1(61.992,44.52)
DD4: D1.2 M1.CN3-14 R14.2 | length 22.7
  Component Side w0.15: M1.CN3-14 51.3,49.5 54.659,49.5 58.378,45.781 58.78,45.379 ; R14.2 59.548,44.611 58.78,45.379 ; D1.2 64.46,44.155 63.19,45.425 58.826,45.425 58.78,45.379
  Solder Side w0.15: M1.CN3-14 M1.CN3-14@50.377,50.788
DD7: J2.2 M1.CN3-10 R12.2 | length 16
  Component Side w0.15: M1.CN3-10 50.032,55.868 51.196,54.704 60.097,54.704 60.772,54.029 R12.2@60.772,53.69 ; J2.2 R12.2@60.74,52.869 ; J2.2@60.808,48.875 60.866,48.933 J2.2@60.866,48.85
DEBUG_CTS: J3.8 J5.8 M1.CN2-10 | length 58.5
  Component Side w0.15: J5.8@38.33,8.848 38.33,24.11 J3.8
  Solder Side w0.15: M1.CN2-10 28.274,57.02 34.38,57.02 39.46,51.94 J3.8
DEBUG_RTS: J3.10 J5.10 M1.CN2-11 | length 55.1
  Component Side w0.15: J5.10@39.6,9.826 39.6,15.6 40.7,16.7 40.7,23.94 J3.10
  Solder Side w0.15: M1.CN2-11 29.839,53.151 30.549,53.151 35.7,48 35.7,24.8 36.563,23.937 40.697,23.937 J3.10
DEBUG_RXD: J3.4 J5.4 M1.CN2-8 | length 55.9
  Component Side w0.15: J3.4 33.2,24.06 33.2,16.9 35.8,14.3 35.8,10.01 J5.4
  Solder Side w0.15: M1.CN2-8@27.008,58.408 M1.CN2-8 25.5,56.786 25.5,55.4 26.3,54.6 26.3,54.588 26.388,54.5 27.674,54.5 28.4,53.774 28.4,52.488 28.488,52.4 28.5,52.4 28.8,52.1 29.98,52.1 34.38,47.7 J3.4
DEBUG_TXD: J3.6 J5.6 M1.CN2-9 | length 49.4
  Component Side w0.15: J3.6 35.65,23.97 35.65,15.957 37.06,14.547 J5.6@37.06,10.626
  Solder Side w0.15: M1.CN2-9 29.662,55.838 36.92,48.58 J3.6
FT_RST_MT: D3.3 R9.2 R11.2 SW1.1 SW1.2 | length 34.5
  Component Side w0.15: R11.2 61.332,55.868 67.375,49.825 67.975,49.825 SW1.1 ; R9.2@69.7,36.425 69.797,36.522 70.312,36.522 72.565,38.775 D3.3 73.7,42.725 68.425,48 SW1.1 ; SW1.2@74.625,48.925 SW1.2 SW1.1
GND: C1.1 J1.3 J1.5 J2.1 J3.2 J4.2 J5.2 J6.2 M1.CN2-1 M1.CN2-3 M1.CN2-5 M1.CN3-1 M1.CN3-3 R3.2 R10.2 R13.2 R16.2 SW1.3 SW1.4 U1.7
NetD1_1: D1.1 R13.1 | length 2.6
  Component Side w0.15: D1.1 R13.1@66.95,40.875
  Component Side w0.3: R13.1@66.95,40.875 R13.1
NetD2_1: D2.1 R14.1 | length 2.6
  Component Side w0.15: R14.1 D2.1@61.95,40.925
  Component Side w0.3: R14.1 R14.1@59.673,40.8 ; D2.1@61.95,40.925 D2.1
NetM1_CN2-17: M1.CN2-17 R4.1 | length 18.3
  Component Side w0.15: R4.1 18.625,35.925 20.3,37.6 20.3,41.303 23.3,44.303 28.257,44.303 M1.CN2-17
NetM1_CN2-18: M1.CN2-18 R5.1 | length 23.7
  Component Side w0.15: R5.1 5.761,48.15 6.085,48.473 6.085,48.535 6.5,48.95 6.5,49 7.1,49.6 23.23,49.6 M1.CN2-18
NetM1_CN2-19: M1.CN2-19 R8.1 | length 27.4
  Component Side w0.15: R8.1 6.875,35.425 v1(6.9,35.4)
  Solder Side w0.15: v1(6.9,35.4) 6.925,35.425 10.105,35.425 16.58,41.9 28.8,41.9 29.326,42.426 29.326,42.466 29.662,42.803 M1.CN2-19
NetM1_CN2-24: M1.CN2-24 R9.1 | length 45.2
  Component Side w0.15: M1.CN2-24 28.41,36.8 58.92,36.8 61.72,39.6 68.3,39.6 69.5,38.4 69.5,37.914 R9.1
NetM1_CN3-9: M1.CN3-9 R11.1 | length 7
  Component Side w0.15: M1.CN3-9 52.566,55.854 R11.1@59.548,55.854
NetR1_2: R1.2 U1.3 | length 3.2
  Component Side w0.15: R1.2 5.705,44.17 U1.3
NetR2_2: R2.2 U1.8 | length 2.7
  Component Side w0.15: R2.2 14.325,36.475 U1.8
NetR6_2: R6.2 U1.6 | length 3.2
  Component Side w0.15: R6.2 5.715,40.36 U1.6
NetR7_2: R7.2 U1.11 | length 3.3
  Component Side w0.15: U1.11 17.603,42.9 R7.2
RECOVERY: J4.6 J6.6 R15.2 | length 30.9
  Component Side w0.15: J4.6 63.19,23.97 63.19,14.796 61.94,13.546 J6.6@61.94,9.099 ; v1(62,36) 62.425,36.425 R15.2@64.7,36.425
  Solder Side w0.15: J4.6 62,25.32 v1(62,36)
RECOVERY_CTS: J4.7 J6.7 M1.CN3-16 | length 58.7
  Component Side w0.15: v1(63.203,3.4) 63.21,3.407 J6.7
  Solder Side w0.15: M1.CN3-16 50.276,48.248 51.464,47.06 53.64,47.06 59.7,41 59.7,37.1 60.7,36.1 60.7,22.1 61.4,21.4 63.16,21.4 J4.7 64.46,4.26 63.623,3.423 63.225,3.423 v1(63.203,3.4)
RECOVERY_FT: M1.CN3-12 R15.1 R16.1 | length 25
  Component Side w0.15: v1(64.48,38.8) v1@64.587,38.8 ; 64.5,38.487 R15.1 R16.1@67.1,37.775
  Solder Side w0.15: M1.CN3-12 50.27,53.07 50.73,53.07 51.8,52 53.178,52 64.48,40.698 v1(64.48,38.8)
RECOVERY_RTS: J4.9 J6.9 M1.CN3-13 | length 52.8
  Component Side w0.15: J6.9 64.48,5.64 64.722,5.883 64.935,5.883 67,7.948 67,8.8 J4.9
  Solder Side w0.15: M1.CN3-13 52.81,50.53 53.37,50.53 62.9,41 62.9,38.2 65.8,35.3 65.8,24.3 66.652,23.448 66.652,23.42 67,23.072 J4.9
RECOVERY_RXD: J4.3 J6.3 M1.CN3-18 | length 50.5
  Component Side w0.15: v1(60.65,3.4) 60.67,3.42 J6.3
  Solder Side w0.15: M1.CN3-18 51.2,44.52 53.78,44.52 58,40.3 58,24.08 J4.3 59.38,4.32 60.254,3.446 60.604,3.446 v1(60.65,3.4)
RECOVERY_TXD: J4.5 J6.5 M1.CN3-15 | length 52.8
  Component Side w0.15: v1(61.9,15.408) 61.9,22.68 J4.5 ; J6.5@61.92,5.408 J6.5 v1(61.94,3.42)
  Solder Side w0.15: M1.CN3-15 54.272,48.248 61.4,41.12 61.4,37.7 63.19,35.91 63.19,23.97 J4.5 ; v1(61.9,15.408) 61.94,15.368 v1(61.94,3.42)
SERVICE_CTS: J3.7 J5.7 M1.CN3-23 | length 49
  Component Side w0.15: v1(38.33,3.4) J5.7 ; v1@38.757,15.957 v1(39,15.957) 39,16.2 39.46,16.66 J3.7
  Solder Side w0.15: v1(38.33,3.4) 38.33,15.287 v1(39,15.957) ; J3.7 39.723,22.437 39.723,21.977 40.45,21.25 42.661,21.25 45.7,24.289 45.7,34.515 48.185,37 51.464,37 M1.CN3-23
SERVICE_RTS: J3.9 J5.9 M1.CN3-24 | length 38.9
  Component Side w0.15: J5.9 39.6,5.64 39.842,5.883 40.055,5.883 42,7.828 J3.9 J3.9@42.198,22.898
  Solder Side w0.15: J3.9 42.099,22.799 42.899,22.799 44.7,24.6 44.7,34.6 48.188,38.088 M1.CN3-24
SERVICE_RXD: J3.3 J5.3 M1.CN3-25 | length 52.2
  Component Side w0.15: v1(35.79,3.4) J5.3
  Solder Side w0.15: J3.3@34.75,22.15 35.65,21.25 ; v1(35.79,3.4) 35.79,21.11 35.65,21.25 ; M1.CN3-25 52.311,35.307 52.311,34.711 52.1,34.5 47.798,34.5 47.3,34.002 47.3,23.1 43.7,19.5 37.4,19.5 35.65,21.25
SERVICE_TXD: J3.5 J5.5 M1.CN3-26 | length 48.2
  Component Side w0.15: J3.5 36.92,16.537 v1(37.5,15.957) ; v1(37.06,3.4) J5.5
  Solder Side w0.15: J3.5 39.22,20.4 43.1,20.4 46.5,23.8 46.5,34.211 47.689,35.4 49.864,35.4 M1.CN3-26 ; v1(37.06,3.4) 37.06,4.391 37.06,15.517 v1(37.5,15.957)
SWCLK: J1.4 R2.1 | length 11.3
  Component Side w0.15: J1.4 10.73,34.23 12.54,36.04 12.602,36.04 12.925,36.364 R2.1
SWCLK_F: R4.2 U1.9 | length 5.1
  Component Side w0.15: U1.9 15.34,40.36 16.3,39.4 16.3,38.55 17.231,37.619 17.231,37.6 17.556,37.275 R4.2
SWD_EN: M1.CN2-23 R10.1 U1.4 U1.10 U1.13 | length 27.2
  Component Side w0.15: U1.4 11.4,42.9 ; U1.13 13.27,45.44 11.4,43.57 11.4,42.9 ; v1(19.3,41.035) R10.1 17.567,41.035 17.243,41.358 17.243,41.42 17.033,41.63 U1.10 12.67,41.63 11.4,42.9
  Solder Side w0.15: v1(19.3,41.035) 20.935,39.4 28.35,39.4 M1.CN2-23
SWDIO: J1.2 R1.1 U1.5 | length 23.3
  Component Side w0.15: U1.5 6.958,41.63 6.7,41.888 6.7,41.9 5.775,42.825 R1.1 5.639,42.825 5.315,42.502 5.315,42.44 4.1,41.225 4.1,34 9.46,28.64 J1.2
SWDIO_DIR: R3.1 R7.1 U1.1 | length 12.7
  Component Side w0.15: U1.1 10.062,46.71 11.6,48.248 15.492,48.248 16.615,47.125 R3.1 17.6,44.303 R7.1
SWDIO_DIR_F: M1.CN2-21 U1.12 | length 20.8
  Component Side w0.15: U1.12 v1(15.6,44.17)
  Solder Side w0.15: v1(15.6,44.17) 15.95,44.52 30.08,44.52 31.1,43.5 31.1,42.066 M1.CN2-21
SWDIO_IN_F: R6.1 R8.2 | length 2.3
  Component Side w0.15: R6.1 5.7,36.79 R8.2
SWDIO_OUT_F: R5.2 U1.2 | length 3.8
  Component Side w0.15: R5.2 5.772,46.8 6.097,46.475 6.097,46.403 7.06,45.44 U1.2
SYSRST_N: D3.1 J1.10 J4.4 J6.4 | length 86.2
  Component Side w0.15: J1.10 14.54,28.24 16.49,30.19 59.38,30.19 ; J6.4@60.67,8.947 60.67,23.95 J4.4 59.38,30.19 ; D3.1 72.75,35.565 67.375,30.19 59.38,30.19
VBUS: M1.CN3-2 NT1.2 | length 16
  Component Side w0.3: M1.CN3-2 M1.CN3-2@50.012,66.312
  Component Side w0.5: M1.CN3-2 52.084,68.1 55.001,68.1 NT1.2
VCC: M1.CN3-4 NT1.1 | length 14.3
  Component Side w0.3: M1.CN3-4 M1.CN3-4@50.112,63.488 ; NT1.1@61.651,59.672 NT1.1
  Component Side w0.5: M1.CN3-4 51.3,62.2 55.5,62.2 58.378,59.322 NT1.1
WAKEUP: D3.2 J4.10 J6.10 | length 31.9
  Component Side w0.15: J6.10@64.48,8.985 64.48,14.62 65.7,15.84 65.7,24.19 66.75,25.24 J4.10 74.65,32.89 D3.2
pads on no net: J1.1 J1.6 J1.7 J1.8 J1.9 J3.1 J4.1 J4.8 J5.1 J6.1 J6.8 M1.CN2-7 M1.CN2-13 M1.CN2-14 M1.CN2-15 M1.CN2-16 M1.CN2-20 M1.CN2-22 M1.CN2-25 M1.CN2-26 M1.CN3-5 M1.CN3-6 M1.CN3-7 M1.CN3-8 M1.CN3-17 M1.CN3-19 M1.CN3-20 M1.CN3-22

## Polygon pours and split planes (outlines as drawn)
GND on Component Side "GND_L01_P000" (solid, pour order 0): 0.5,69 1,69.5 79,69.5 79.5,69 79.5,1 79,0.5 1,0.5 0.5,1
GND on Solder Side "GND_L02_P001" (solid, pour order 1): 0.5,69 1,69.5 79,69.5 79.5,69 79.5,1 79,0.5 1,0.5 0.5,1

## Keep-outs
Component Side:
  circle w1.2: c74.983,64.99 r2.25
  circle w1.2: c75.008,5.015 r2.25
  circle w1.2: c5.008,64.99 r2.25
  circle w1.2: c4.983,4.99 r2.25
Solder Side:
  circle w1.2: c74.983,64.99 r2.25
  circle w1.2: c75.008,5.015 r2.25
  circle w1.2: c5.008,64.99 r2.25
  circle w1.2: c4.983,4.99 r2.25

## Silkscreen, mask and mechanical layers (free items; w line width, h text height)
Top Overlay:
  circle w0.2: c74.983,64.99 r3
  circle w0.2: c4.983,4.99 r3
  circle w0.2: c75.008,5.015 r3
  circle w0.2: c5.008,64.99 r3
  rectangle: 8.758,57.645 17.458,64.245
  region: 23.985,64.044 23.985,66.619 20.585,66.619 20.585,64.044
  lines w0.254: 62,12.1 62,12.7 62.8,13.5 63.203,13.5
  text "P-FTINT-2-0" at 8.974,64.654 h2.8
  text "VBUS" at 57.758,60.39 h1.9
  text "VCC" at 57.438,58.8 h1.9
  text "Debug" at 24,30.2 h2
  text "RESET" at 59.9,29.6 h0.85 r90
  text "RECOVERY" at 62.5,29.6 h0.85 r90
  text "GND" at 32.444,29.507 h0.85 r90
  text "RXD" at 35.098,29.507 h0.85 r90
  text "TXD" at 37.638,29.507 h0.85 r90
  text "CTS" at 39.956,29.507 h0.85 r90
  text "RTS" at 42.496,29.507 h0.85 r90
  text "GND" at 57.2,29.5 h0.85 r90
  text "SWD" at 10,17.1 h2
  text "Recovery" at 49.9,16.6 h2
  text "Service" at 24,16.5 h2
  text "RXD" at 34.778,16.072 h0.85 r90
  text "TXD" at 37.378,16.072 h0.85 r90
  text "RTS" at 42.178,16.072 h0.85 r90
  text "CTS" at 40.088,16.047 h0.85 r90
  text "RXD" at 59.7,16 h0.85 r90
  text "TXD" at 62.4,16 h0.85 r90
  text "CTS" at 64.7,16 h0.85 r90
  text "RTS" at 67.5,16 h0.85 r90
  text "RECOVERY" at 63.7,13 h0.85
  text "GND" at 35,12 h0.85 r90
  text "RXD" at 36.3,12 h0.85 r90
  text "TXD" at 37.6,12 h0.85 r90
  text "CTS" at 38.9,12 h0.85 r90
  text "RTS" at 40.2,12 h0.85 r90
  text "GND" at 59.7,12 h0.85 r90
  text "RESET" at 61,12 h0.85 r90
  text "Debug" at 27.6,11.6 h2
  text "Service" at 26.6,3.139 h2
  text "Recovery" at 50,3.139 h2
  text "RTS" at 39.9,1.1 h0.85 r90
  text "RTS" at 65.14,1.1 h0.85 r90
  text "RXD" at 36.1,1 h0.85 r90
  text "TXD" at 37.3,1 h0.85 r90
  text "TXD" at 62.4,1 h0.85 r90
  text "CTS" at 38.588,0.947 h0.85 r90
  text "RXD" at 61,0.947 h0.85 r90
  text "CTS" at 63.7,0.947 h0.85 r90
Board Outline (31):
  lines w0.254: 1,-0.002 79.148,-0.002 ccw(c79.148,0.9) 80.05,0.9 80.05,69.267 ; 1,0 cw(c1,1) 0,1 0,69.065 cw(c1,69.065) 1,70.065 79.25,70.065 cw(c79.25,69.267) 80.048,69.267

## Text inside footprints (layer, text, board x,y; h text height)
M1: Top Overlay "USB" at 37.912,66.088 h1.52